# EAGLE board hnb-display (EAGLE 7.1.0)
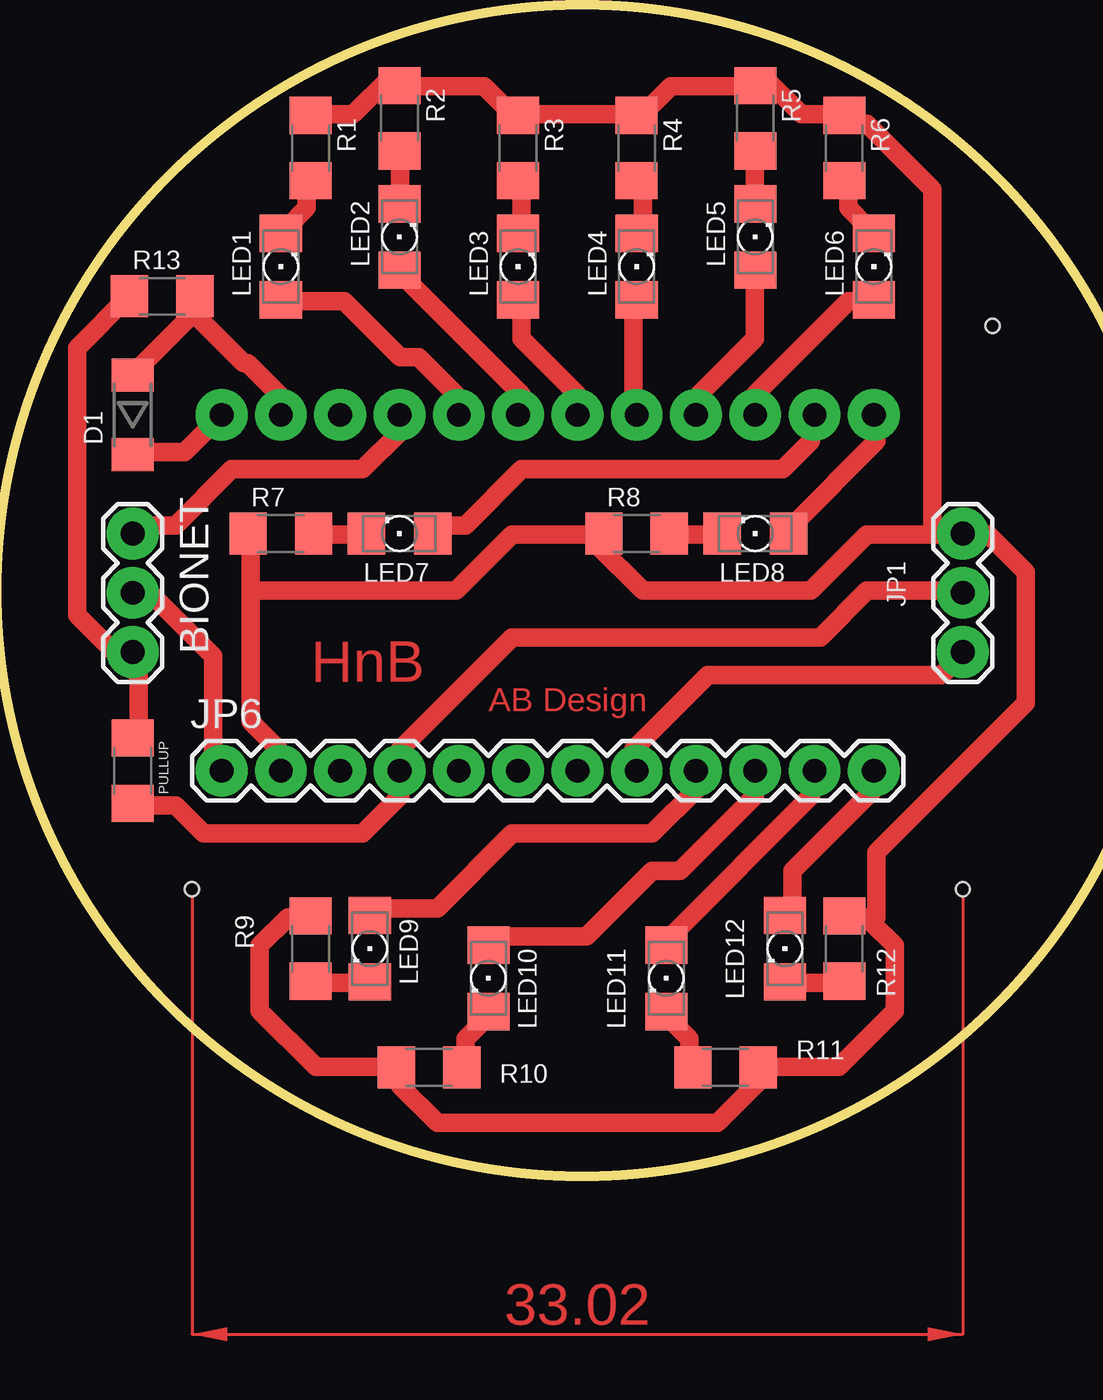
[diagram p0: board, top side]
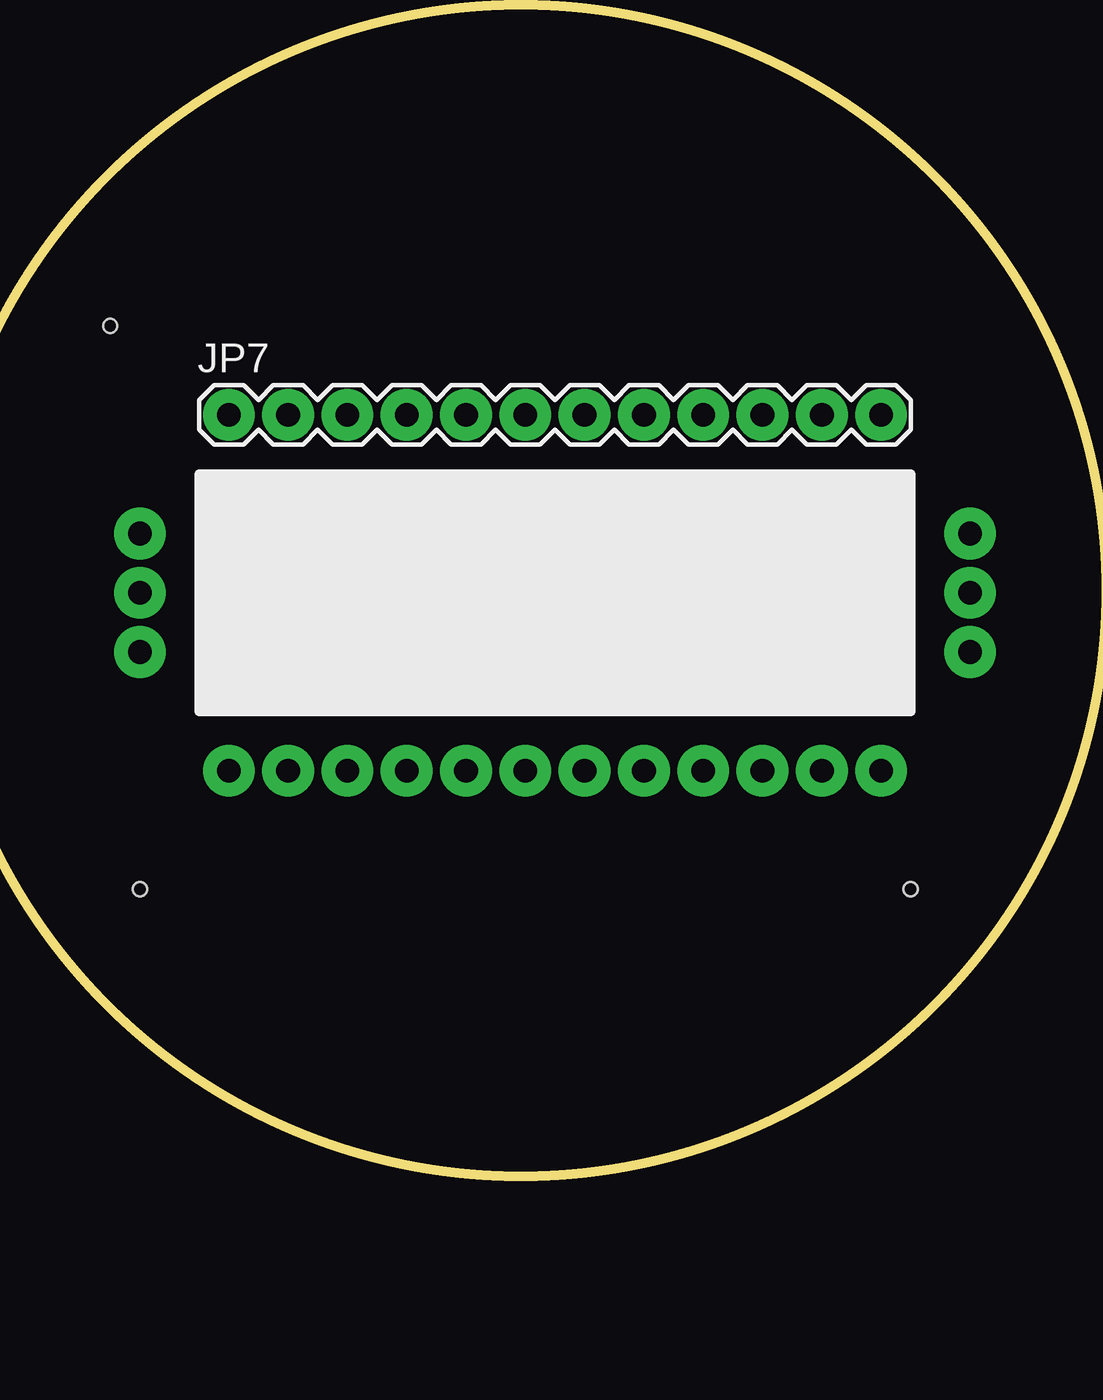
[diagram p1: board, bottom side, seen from below]

No outline drawn. Coordinates in mm, seen from the top.
Copper layers (1*16): Top 0.035mm / dielectric 1.5mm / Bottom 0.035mm
Design rules "make": minimum track width 0.8mm, minimum drill 0.8mm, track to track 0.8mm, track to pad 0.8mm, pad to pad 0.45mm, via to via 0.8mm, smd to smd 8mil, copper to edge 10mil, drill to drill 8mil, minimum pad ring 0.6mm, minimum via ring 0.6mm, stop-mask expansion 0mil, vias tented up to drill 0mil, thermal gap 10mil
Net classes: 0 default: width 0.203 mm; 1 vcc: width 0.254 mm
Holes 0.6 mm at 68.58,53.34 34.29,29.21 67.31,29.21
Milling: area 25.9,16.9 to 76.1,67.1

## Footprints (pad centres in the part's own frame; a part is rotated, then mirrored left to right if it is on the bottom)
1X03 = drill 1.016 pad 1.88: 1 0,0; 2 2.54,0; 3 5.08,0
SOD80 = smd 1.4 x 1.8: 1 -1.7,0; 2 1.7,0
1X12 = drill 1.016 pad 1.88: 1 0,0; 2 2.54,0; 3 5.08,0; 4 7.62,0; 5 10.16,0; 6 12.7,0; 7 15.24,0; 8 17.78,0; 9 20.32,0; 10 22.86,0; 11 25.4,0; 12 27.94,0
1206 = smd 1.6 x 1.803: A -1.422,0; C 1.422,0
1206' = smd 1.6 x 1.8: 1 -1.4,0; 2 1.4,0

## Placement (x,y rotation side)
BIONET  BIONET  [1X03]  31.75,39.37 90 top
D1  [SOD80]  31.75,49.53 90 top
JP1  BUTTONS  [1X03]  67.31,44.45 270 top
JP6  [1X12]  35.56,34.29 0 top
JP7  [1X12]  63.5,49.53 0 bottom
LED1  [1206]  38.1,55.88 90 top
LED2  [1206]  43.18,57.15 90 top
LED3  [1206]  48.26,55.88 90 top
LED4  [1206]  53.34,55.88 90 top
LED5  [1206]  58.42,57.15 90 top
LED6  [1206]  63.5,55.88 90 top
LED7  [1206]  43.18,44.45 180 top
LED8  [1206]  58.42,44.45 180 top
LED9  [1206]  41.91,26.67 270 top
LED10  [1206]  46.99,25.4 270 top
LED11  [1206]  54.61,25.4 270 top
LED12  [1206]  59.69,26.67 270 top
PULLUP  [1206']  31.75,34.29 270 top
R1  [1206']  39.37,60.96 270 top
R2  [1206']  43.18,62.23 270 top
R3  [1206']  48.26,60.96 270 top
R4  [1206']  53.34,60.96 270 top
R5  [1206']  58.42,62.23 270 top
R6  [1206']  62.23,60.96 270 top
R7  [1206']  38.1,44.45 0 top
R8  [1206']  53.34,44.45 0 top
R9  [1206']  39.37,26.67 90 top
R10  [1206']  44.45,21.59 180 top
R11  [1206']  57.15,21.59 0 top
R12  [1206']  62.23,26.67 90 top
R13  [1206']  33.02,54.61 0 top
U$1  [A5L-LOC]  -45.72,-29.21 0 top

## Library data of the parts
BIONET JP1 = SparkFun-Connectors
D1 = semicon-smd-ipc
JP6 JP7 = SparkFun
LED1-LED12 = led
PULLUP R1-R13 = SparkFun-Passives
U$1 = frames

## Nets
A0: JP1.3 JP6.8
A1: JP6.7
A2: JP6.6
A3: JP6.5
D2: JP7.8 LED1.A
D3: JP7.7 LED2.A
D4: JP7.6 LED3.A
D5: JP7.5 LED4.A
D6: JP7.4 LED5.A
D7: JP7.3 LED6.A
D8: JP7.2 LED7.A
D9: JP7.1 LED8.A
D10: JP6.12 LED12.A
GND [vcc]: JP1.1 JP6.2 R1.1 R2.1 R3.1 R4.1 R5.1 R6.1 R7.1 R8.1 R9.2 R10.2 R11.2 R12.2
GND2 [vcc]: BIONET.3 JP7.9
MISO: JP6.10 LED10.A
MOSI: JP6.11 LED11.A
N$1: LED1.C R1.2
N$2: LED2.C R2.2
N$3: LED3.C R3.2
N$4: LED4.C R4.2
N$5: LED5.C R5.2
N$6: LED6.C R6.2
N$7: LED7.C R7.2
N$8: LED8.C R8.2
N$9: LED12.C R12.1
N$10: LED10.C R10.1
N$11: LED11.C R11.1
N$12: LED9.C R9.1
N$13: BIONET.1 PULLUP.1 R13.1
RAW [vcc]: BIONET.2 JP6.1
RESET: JP6.3
RESET2: JP7.10
RXI: D1.2 JP7.11 R13.2
SCK: JP6.9 LED9.A
TXO: D1.1 JP7.12
VCC: JP1.2 JP6.4 PULLUP.2

## Tracks (layer width: path | path; a pad name or v marks a point on that pad's centre or on a via)
A0
  Top 0.8: JP6.8 53.2,34.4 53.2,35.2 56.4,38.4 66.4,38.4 67.2,39.2 JP1.3
D2
  Top 0.8: LED1.A 38.4,54.4 40.8,54.4 43.2,52 44,52 45.6,50.4 45.6,49.6 JP7.8
D3
  Top 0.8: LED2.A 43.2,55.6 48.4,50.4 48.4,49.6 JP7.7
D4
  Top 0.8: JP7.6 50.8,50.4 48.4,52.8 48.4,54.4 LED3.A
D5
  Top 0.8: LED4.A 53.2,54.4 53.2,49.6 JP7.5
D6
  Top 0.8: LED5.A 58.4,55.6 58.4,52.8 56,50.4 56,49.6 JP7.4
D7
  Top 0.8: LED6.A 63.2,54.4 62.4,54.4 58.4,50.4 58.4,49.6 JP7.3
D8
  Top 0.8: LED7.A 44.8,44.8 46,44.8 48.4,47.2 59.6,47.2 60.8,48.4 60.8,49.2 JP7.2
D9
  Top 0.8: LED8.A 60,44.8 63.6,48.4 63.6,49.2 JP7.1
D10
  Top 0.8: LED12.A 60,28.4 60,30 63.6,33.6 63.6,34 JP6.12
GND
  Top 0.8: R9.2 39.2,28 38.4,28 37.2,26.8 37.2,24 39.6,21.6 42.8,21.6 R10.2 43.2,21.2 43.2,20.8 44.8,19.2 56.8,19.2 58.8,21.2 R11.2 58.8,21.6 62,21.6 64.4,24 64.4,26.8 63.4,27.8 | 63.4,27.8 63.2,28 62.4,28 R12.2 | R1.1 39.6,62.4 41.2,62.4 42.8,64 R2.1 43.2,63.6 46.8,63.6 48,62.4 R3.1 48.4,62.4 53.2,62.4 R4.1 53.6,62.4 54.8,63.6 58.4,63.6 R5.1 58.8,64 60.4,62.4 62,62.4 R6.1 62.4,62 63.2,62 66,59.2 66,44.4 | 36.8,42 36.8,36.4 38,35.2 38,34.4 JP6.2 | 36.8,42 36.8,44.4 R7.1 | 36.8,42 45.6,42 48,44.4 51.6,44.4 R8.1 51.6,44 53.6,42 60.8,42 63.2,44.4 66,44.4 | 66,44.4 67.2,44.4 JP1.1 67.6,44.4 68.4,44.4 70,42.8 70,37.2 63.6,30.8 63.6,28 63.4,27.8
GND2
  Top 0.8: BIONET.3 32,44.8 33.6,44.8 36,47.2 41.6,47.2 43.2,48.8 43.2,49.2 JP7.9
MISO
  Top 0.8: LED10.A 47.2,27.2 51.2,27.2 54,30 55.2,30 58.4,33.2 58.4,34 JP6.10
MOSI
  Top 0.8: LED11.A 54.8,27.2 60.8,33.2 60.8,34 JP6.11
N$1
  Top 0.8: R1.2 39.2,59.2 39.2,58.4 38.4,57.6 LED1.C
N$2
  Top 0.8: R2.2 43.2,60.8 43.2,58.8 LED2.C
N$3
  Top 0.8: R3.2 48.4,59.2 48.4,57.6 LED3.C
N$4
  Top 0.8: R4.2 53.6,59.2 53.6,57.6 LED4.C
N$5
  Top 0.8: R5.2 58.4,60.8 58.4,58.8 LED5.C
N$6
  Top 0.8: R6.2 62.4,59.2 62.4,58.4 63.2,57.6 LED6.C
N$7
  Top 0.8: R7.2 39.6,44.4 41.6,44.4 LED7.C
N$8
  Top 0.8: R8.2 54.8,44.4 56.8,44.4 LED8.C
N$9
  Top 0.8: R12.1 62,25.2 60,25.2 LED12.C
N$10
  Top 0.8: R10.1 46,21.6 46,22.8 46.8,23.6 LED10.C
N$11
  Top 0.8: R11.1 55.6,21.6 55.6,22.8 54.8,23.6 LED11.C
N$12
  Top 0.8: R9.1 39.6,25.2 41.6,25.2 LED9.C
N$13
  Top 0.8: PULLUP.1 32,36 32,39.2 BIONET.1 31.75,38.58 29.37,40.96 29.37,52.39 31.59,54.61 R13.1
RAW
  Top 0.8: BIONET.2 32,42 32.4,42 35.2,39.2 35.2,34.4 JP6.1
RXI
  Top 0.8: 34.29,53.82 31.75,51.28 D1.2 | 34.29,53.82 34.29,54.61 R13.2 | JP7.11 38.1,50.32 36.67,51.75 36.51,51.75 34.61,53.66 34.29,53.82
SCK
  Top 0.8: LED9.A 42,28.4 44.8,28.4 48,31.6 54,31.6 56,33.6 56,34 JP6.9
TXO
  Top 0.8: JP7.12 33.97,47.94 31.75,47.94 D1.1
VCC
  Top 0.8: PULLUP.2 32,32.8 33.6,32.8 34.8,31.6 41.6,31.6 43.2,33.2 43.2,34 JP6.4 43.2,34.4 43.2,35.2 48,40 61.2,40 63.2,42 67.2,42 JP1.2
(copper drawn outside any net)
  shapes: Top area x1

## Text on the board
Top: HnB | AB Design
Document: TX | Buttons | GND | GND | 12V | 12V | 5V | NET | IN | HnB Display V1.0